# Altium PCB VCO.PcbDoc (part 1 of 3)
Units mil, origin at the board's own origin, x right, y up, seen from the top; angles counter-clockwise.
Board outline 4000 x 2000 mil, 4 copper layers (Top Layer, Signal Layer 1, Signal Layer 2, Bottom Layer), stack 60.6 mil thick; 123 components, 70 nets, 383 pads, 321 vias.
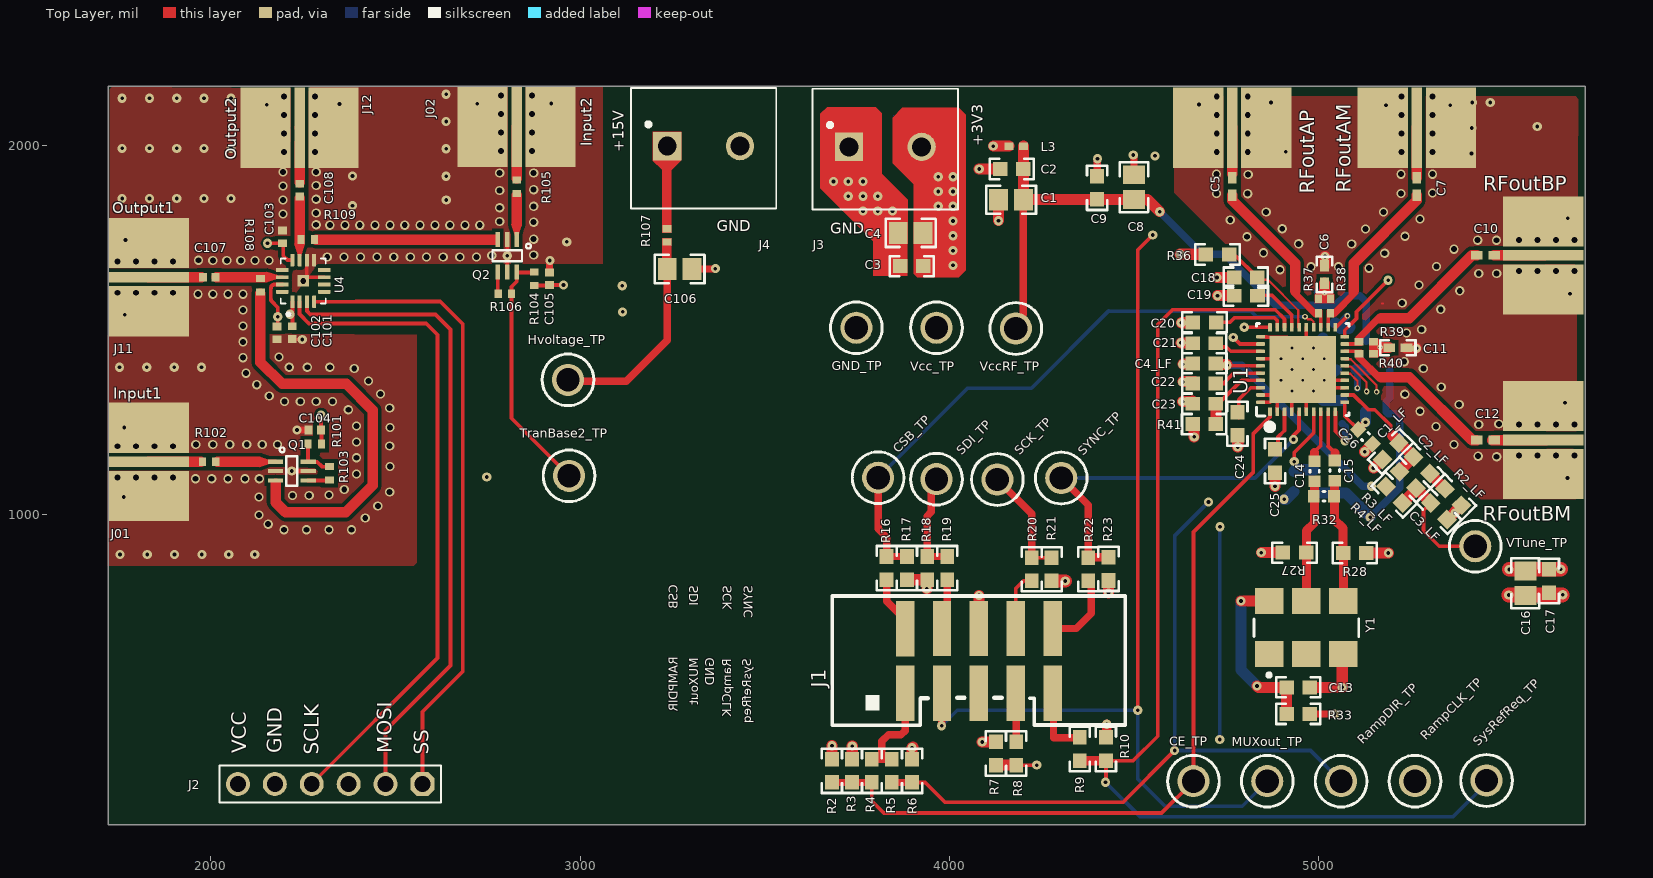
[diagram p0: Top Layer view]
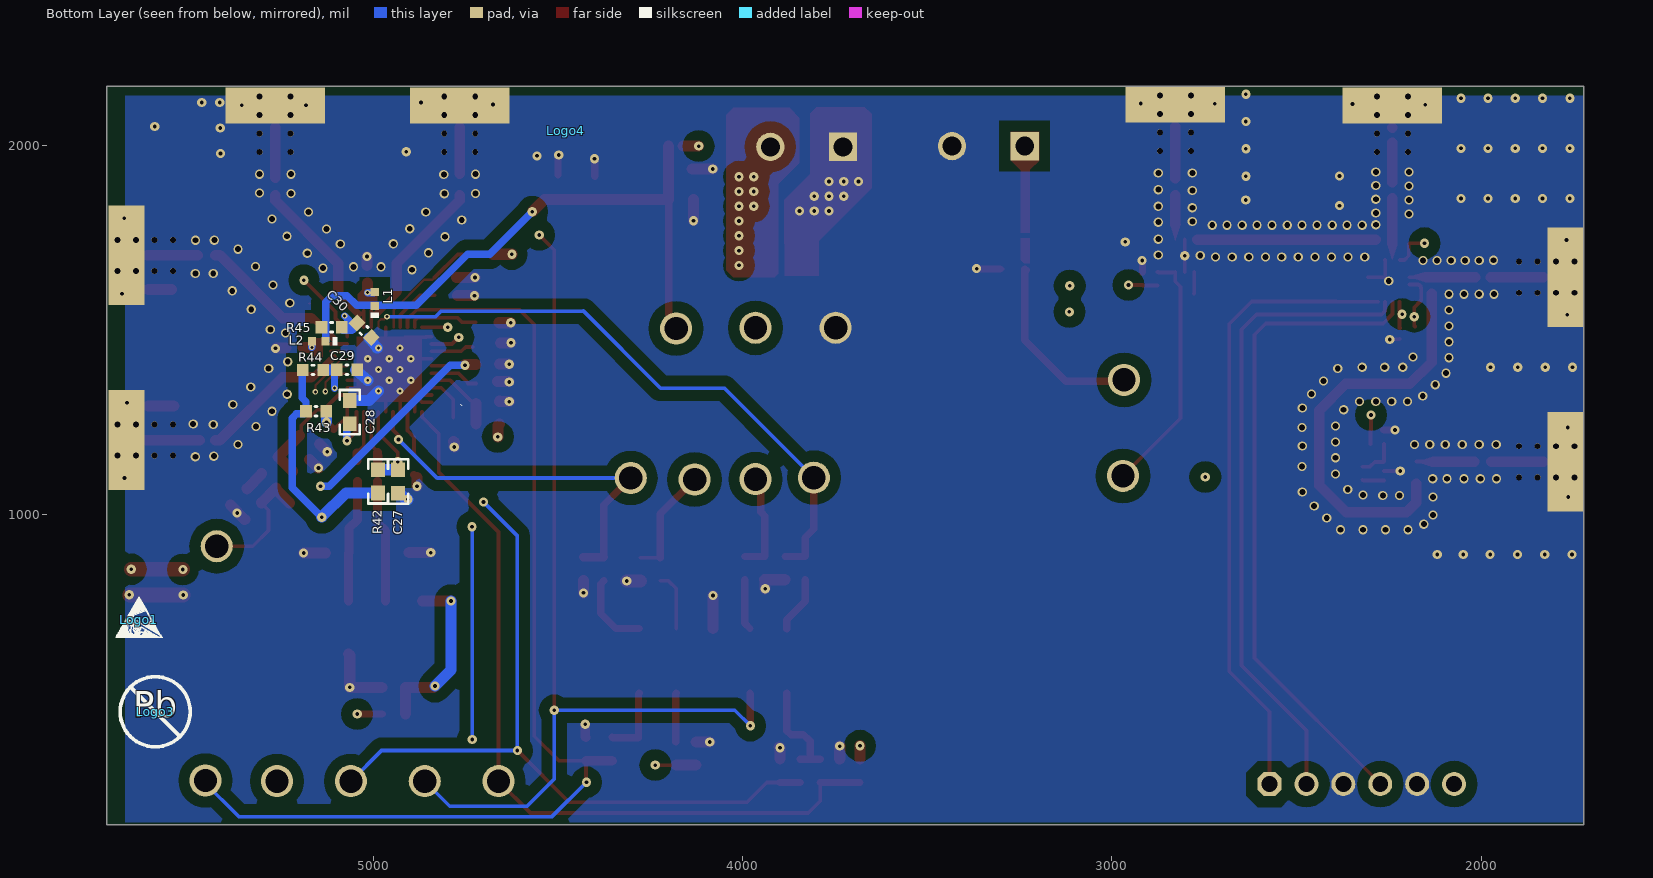
[diagram p1: Bottom Layer view, seen from below]
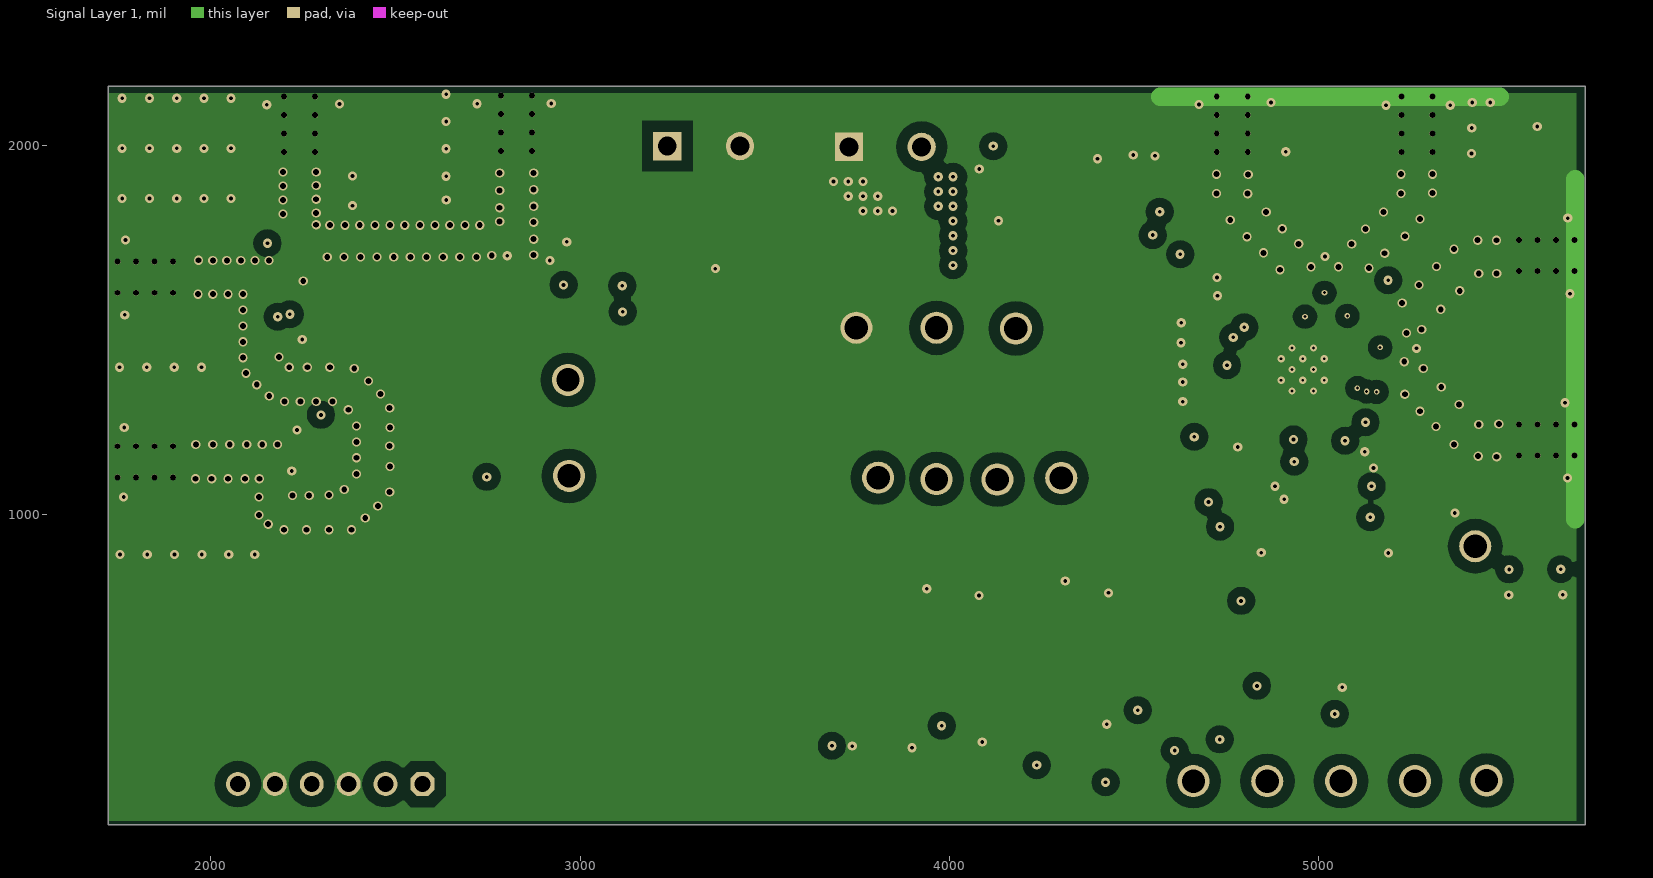
[diagram p2: Signal Layer 1]
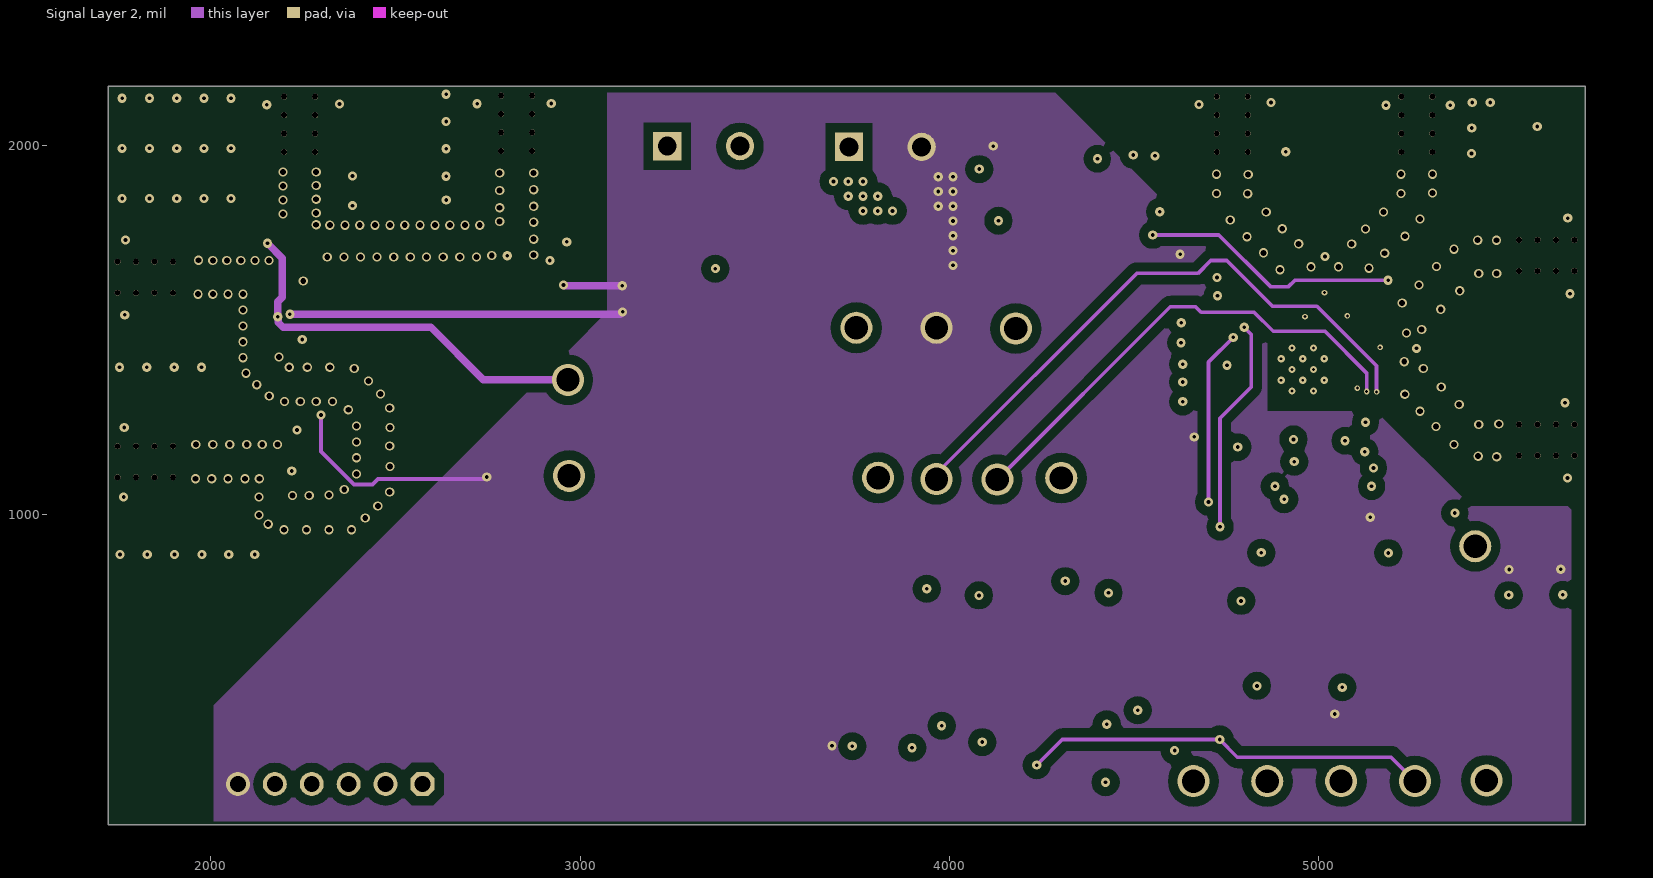
[diagram p3: Signal Layer 2]

## Layer stack, top to bottom
Top Solder: solder mask 0.4, Solder Resist, Dk 3.5
Top Layer: signal copper 1.4
Dielectric1: prepreg 16, Rogers4003C, Dk 3.38
Signal Layer 1: signal copper 1.4
Dielectric 3: core 27, Dk 4.1
Signal Layer 2: signal copper 1.4
Dielectric 2: prepreg 12, Dk 4.1
Bottom Layer: signal copper 1.4
Bottom Solder: solder mask 0.4, Solder Resist, Dk 3.5

## Board outline
1722,161 1722,2161 5722,2161 5722,161

## Design rules (kind name [scope] priority, off if disabled: settings)
AcuteAngle [All] p1: minimum=4.50000000000000E+0001 checktracksonly=FALSE
AssemblyTestPointUsage [All] p1: valid=2
Clearance Clearance_BoardEdge_MountingHoles [OnCopper and InComponentClass('Mounting Holes')] p1: gap=40 ignorepadtopadclearanceinfootprint=FALSE except(0: Arc-Hole Track-Hole SMDPad-Hole THPad-Hole Via-Hole Fill-Hole Poly-Hole Region-Hole Text-Hole)
Clearance Clearance_poly_top [OnLayer('Top Layer') vs InNet('GND')] p2: gap=6 ignorepadtopadclearanceinfootprint=FALSE except(0: Arc-Hole Track-Hole SMDPad-Hole THPad-Hole Via-Hole Fill-Hole Poly-Hole Region-Hole Text-Hole; 10: Arc-Poly Track-Poly SMDPad-Poly THPad-Poly Via-Poly Fill-Poly Poly-Poly Poly-Region Poly-Text)
Clearance Clearance_poly_gnd_25 [OnLayer('Signal Layer 1')] p3: gap=10 ignorepadtopadclearanceinfootprint=FALSE except(0: Arc-Hole Track-Hole SMDPad-Hole THPad-Hole Via-Hole Fill-Hole Poly-Hole Region-Hole Text-Hole; 25: Via-Poly; 30: Arc-Poly Track-Poly SMDPad-Poly THPad-Poly Fill-Poly Poly-Poly)
Clearance Clearance_poly_BOTTOM [OnLayer('Bottom Layer')] p4: gap=6 ignorepadtopadclearanceinfootprint=FALSE except(0: Arc-Hole Track-Hole SMDPad-Hole THPad-Hole Via-Hole Fill-Hole Poly-Hole Region-Hole Text-Hole; 30: Arc-Poly Track-Poly SMDPad-Poly THPad-Poly Via-Poly Fill-Poly Poly-Poly)
Clearance Clearance_poly_pwr_1 [OnLayer('Signal Layer 2')] p5: gap=6 ignorepadtopadclearanceinfootprint=FALSE except(0: Arc-Hole Track-Hole SMDPad-Hole THPad-Hole Via-Hole Fill-Hole Poly-Hole Region-Hole Text-Hole; 25: Arc-Poly Track-Poly SMDPad-Poly THPad-Poly Via-Poly Fill-Poly Poly-Poly Poly-Region Poly-Text)
Clearance [All] p6: gap=6 ignorepadtopadclearanceinfootprint=FALSE except(0: Arc-Hole Track-Hole SMDPad-Hole THPad-Hole Via-Hole Fill-Hole Poly-Hole Region-Hole Text-Hole)
ComponentClearance ComponentClearance_Logo [InComponentClass('Logo')] p1: gap=30 collisioncheckmode=3 verticalgap=10 showdistances=FALSE
ComponentClearance ComponentClearance_R14 [InComponent('R14') vs InComponent('R14p')] p2: gap=0 collisioncheckmode=3 verticalgap=0 showdistances=FALSE
ComponentClearance ComponentClearance_SYNC_BREAKAWAY [InComponent('H2') vs InComponent('SYNC*/SysRefReq*')] p3: gap=0 collisioncheckmode=3 verticalgap=0 showdistances=FALSE
ComponentClearance ComponentClearance_ScrewToNut [(HasFootprint('NY PMS 440 0025 PH')) vs (HasFootprint('Keystone_1902C'))] p4: gap=5 collisioncheckmode=3 verticalgap=10 showdistances=FALSE
ComponentClearance ComponentClearance_MountingHoles [InComponentClass('Mounting Holes')] p5: gap=250 collisioncheckmode=3 verticalgap=100000 showdistances=FALSE
ComponentClearance ComponentClearance_SmallPassives [HasFootprint('0201*') or HasFootprint('0402*') or HasFootprint('0508') or HasFootprint('0603*') or HasFootprint('0612') or HasFootprint('0805*') or HasFootprint('0815*') or HasFootprint('0830*') or HasFootprint('1206*') or HasFootprint('1210*') or HasFootprint('1808*') or HasFootprint('1812*') or HasFootprint('1825*') or HasFootprint('2010*') or HasFootprint('2220*') or HasFootprint('2225*') or HasFootprint('2512*') or HasFootprint('2728*') or HasFootprint('3518*') vs HasFootprint('0201*') or HasFootprint('0402*') or HasFootprint('0508') or HasFootprint('0603*') or HasFootprint('0612') or HasFootprint('0805*') or HasFootprint('0815*') or HasFootprint('0830*') or HasFootprint('1206*') or HasFootprint('1210*') or HasFootprint('1808*') or HasFootprint('1812*') or HasFootprint('1825*') or HasFootprint('2010*') or HasFootprint('2220*') or HasFootprint('2225*') or HasFootprint('2512*') or HasFootprint('2728*') or HasFootprint('3518*')] p6: gap=5 collisioncheckmode=3 verticalgap=10 showdistances=FALSE
ComponentClearance ComponentClearance_THtoSMT [IsThruComponent vs IsSMTComponent] p7: gap=13 collisioncheckmode=3 verticalgap=30 showdistances=FALSE
ComponentClearance ComponentClearance_THtoTH [IsThruComponent vs IsThruComponent] p8: gap=13 collisioncheckmode=3 verticalgap=30 showdistances=FALSE
ComponentClearance [All] p9: gap=8 collisioncheckmode=3 verticalgap=10 showdistances=FALSE
DiffPairsRouting [All] p1: maxlimit=100 minlimit=10 mostfreqgap=10 toplayer_minwidth=15 toplayer_maxwidth=15 toplayer_prefwidth=15 midlayer1_minwidth=15 midlayer1_maxwidth=15 midlayer1_prefwidth=15 midlayer2_minwidth=15 midlayer2_maxwidth=15 midlayer2_prefwidth=15 bottomlayer_minwidth=15 bottomlayer_maxwidth=15 bottomlayer_prefwidth=15 maxuncoupledlength=1000
FabricationTestPointUsage TestPointUsage [All] p1: valid=2 allowmultiple=FALSE
FabricationTestpoint Testpoint [All] p1: side=3 testpointundercomponent=TRUE minsize=40 maxsize=100 preferedsize=60 minholesize=0 maxholesize=40 preferedholesize=32 testpointgrid=1 allowsidetop=TRUE allowsidebottom=TRUE usegrid=TRUE gridtolerance=0.01
FanoutControl Fanout_LCC [IsLCC] p1: bgadir=Out bgaviamode=Centered fanoutstyle=Auto fanoutdirection=Alternating viagrid=1 // Fanout_LCC (Default Rule)
FanoutControl Fanout_BGA [IsBGA] p2: bgadir=Out bgaviamode=Centered fanoutstyle=Auto fanoutdirection=Alternating viagrid=1 // Fanout_BGA (Default Rule)
FanoutControl Fanout_Default [All] p4: bgadir=Out bgaviamode=Centered fanoutstyle=Auto fanoutdirection=Alternating viagrid=1 // Fanout_Default (Default Rule)
FanoutControl Fanout_Small [(CompPinCount < 5)] p5: bgadir=Out bgaviamode=Centered fanoutstyle=Auto fanoutdirection=OutThenIn viagrid=1 // Fanout_Small (Default Rule)
HoleSize [All] p1: absolutevalues=TRUE maxlimit=580 minlimit=7.8 maxpercent=80.000 minpercent=20.000
MinimumAnnularRing MinimumAnnularRing_ThermalPadVias [IsVia and InAnyComponent] p1: minimumring=5.91
MinimumAnnularRing [All] p2: minimumring=3.5
MinimumSolderMaskSliver MinimumSolderMaskSliver_Logo [InComponentClass('Logo') vs InComponentClass('Logo')] p1: minsoldermaskwidth=0.7
MinimumSolderMaskSliver [All] p2: minsoldermaskwidth=0.2
PlaneClearance PlaneClearance_1 [withinroom('RF2')        or withinroom('RFvia_1')] p2: clearance=25
PlaneConnect [All] p1: planeconnectstyle=Direct reliefexpansion=10 reliefentries=4 reliefconductorwidth=10 reliefairgap=10
PolygonConnect PolygonConnect-pad [ispad] p1: connectstyle=Direct reliefconductorwidth=15 reliefentries=4 polygonreliefangle="90 Angle" airgapwidth=10
PolygonConnect PolygonConnect-via [isvia] p2: connectstyle=Direct reliefconductorwidth=10 reliefentries=4 polygonreliefangle="90 Angle" airgapwidth=10
RoomDefinition VCO [InComponentClass('VCO')] p1: confinementstyle=ConfineIn formatcopy=TRUE lockcomponents=FALSE outline -942,-2294 6707,-2294 6707,2605 -942,2605
RoomDefinition PVC [InComponentClass('PVC')] p2: confinementstyle=ConfineIn formatcopy=TRUE lockcomponents=FALSE outline 1061,2607 6738,2607 6738,-420 1061,-420
RoutingVias [All] p1: holewidth=13 width=25 viastyle="Through Hole" minholewidth=2 minwidth=5 maxholewidth=18 maxwidth=25
RoutingVias ThermalPadVias [IsVia and InAnyComponent] p2: holewidth=7.87 width=19.68 viastyle="Through Hole" minholewidth=2 minwidth=5 maxholewidth=12.99 maxwidth=23.62
SMDToCorner [All] p1: distance=30000
SilkToSilkClearance [All] p1: silktosilkclearance=0
SilkToSolderMaskClearance SilkscreenOverComponentPads [IsPad] p1: minsilkscreentomaskgap=0.9 clearancetoexposedcopper=TRUE
SolderMaskExpansion [All] p1: expansion=1.97 istentingtop=FALSE
Width 50ohm [InNetClass('50OHM')] p1: maxlimit=50 minlimit=8 preferedwidth=20
Width [All] p2: maxlimit=200 minlimit=5 preferedwidth=5 checkconnectedcopper=TRUE
16 further rules are at their usual default settings.

## Classes and differential pairs
component class VCO: C1 C1_LF C2 C2_LF C3 C3_LF C4 C4_LF C5 C6 C7 C8 C9 C10 C11 C12 C13 C14 C15 C16 C17 C18 C19 C20 C21 C22 C23 C24 C25 C26 C27 C28 C29 C30 CSB_TP GND_TP J1 J3 L1 L2 L3 Logo1 Logo3 Logo4 MUXout_TP R2 R2_LF R3 R3_LF R4 R4_LF R5 R6 R7 R8 R9 R10 R16 R17 R18 R19 R20 R21 R22 R23 R27 R28 R32 R33 R36 R37 R38 R39 R40 R41 R42 R43 R44 R45 RampCLK_TP RampDIR_TP RFoutAM RFoutAP RFoutBM RFoutBP SCK_TP SDI_TP SYNC_TP SysRefReq_TP U1 Vcc_TP VccRF_TP Vtune_TP Y1
component class PVC: C101 C102 C103 C104 C105 C106 C107 C108 Hvoltage_TP J01 J2 J02 J4 J11 J12 Q1 Q2 R101 R102 R103 R104 R105 R106 R107 R108 R109 TranBase2_TP U4
component class Header: J1

## Components (designator, comment, footprint, x,y, rotation, side; value= is the part's Value field where it differs from the comment)
C1 "0603YC104JAT2A" 0603 4169,1937 r0 top value=0.1uF
C1_LF "C0603C391J5GACTU" 0603 5195,1172.8 r225 top value=390pF
C2 "C0805C106K8PACTU" 0805 4167,1854 r0 top value=10uF
C2_LF "GRM188R71H683KA93D" 0603 5279.6,1134.5 r315 top value=0.068uF
C3 "0603YC104JAT2A" 0603 3898,1674 r0 top value=0.1uF
C3_LF "GRM1885C2A301JA01D" 0603 5325.86,1010.1 r315 top value=300pF
C4 "C0805C106K8PACTU" 0805 3895,1764 r0 top value=10uF
C4_LF "GRM1885C1H182JA01D" 0603 4690.5,1410.6 r0 top value=1800pF
C5 "520L103KT16T" 0402_065 4766.06,1889.3 r270 top value=0.01uF
C6 "520L103KT16T" 0402_065 5016.06,1651.5 r270 top value=0.01uF
C7 "520L103KT16T" 0402_065 5266.06,1889.3 r270 top value=0.01uF
C8 "C0805C106K8PACTU" 0805 4500,1888 r270 top value=10uF
C9 "0603YC104JAT2A" 0603 4400,1886 r270 top value=0.1uF
C10 "520L103KT16T" 0402_065 5452.3,1703.11 r180 top value=0.01uF
C11 "520L103KT16T" 0402_065 5214.5,1453.06 r180 top value=0.01uF
C12 "520L103KT16T" 0402_065 5452.3,1203 r180 top value=0.01uF
C13 "C1608X7R1C105K080AC" 0603 4945,533 r0 top value=1uF
C14 "0603YC104JAT2A" 0603L 4989,1118.4 r90 top value=0.1uF
C15 "0603YC104JAT2A" 0603L 5044.18,1120.1 r90 top value=0.1uF
C16 "C0805C106K8PACTU" 0805 5560,815 r90 top value=10uF
C17 "0603YC104JAT2A" 0603 5624,821 r90 top value=0.1uF
C18 "C1608X7R1C105K080AC" 0603 4802.8,1643 r0 top value=1uF
C19 "C1608X5R1A106M080AC" 0603 4803,1594 r0 top value=10uF
C20 "C1608X5R1A106M080AC" 0603 4691,1521.7 r180 top value=10uF
C21 "C1608X5R1A106M080AC" 0603 4690.3,1465.3 r0 top value=10uF
C22 "C1608X5R1A106M080AC" 0603 4690.3,1356.2 r180 top value=10uF
C23 "C1608X7R1C105K080AC" 0603 4690.3,1301.3 r0 top value=1uF
C24 "C1608X7R1C105K080AC" 0603 4780.3,1246.9 r90 top value=1uF
C25 "C1608X5R1A106M080AC" 0603 4882.03,1146.4 r270 top value=10uF
C26 "C1608X7R1C105K080AC" 0603L 5126.7,1212 r135 top value=1uF
C27 "C1608X7R1C105K080AC" 0603 4933.3,1090.9 r90 bottom value=1uF
C28 "C1608X7R1C105K080AC" 0603 5064.15,1278.51 r270 bottom value=1uF
C29 "C1608X7R1C105K080AC" 0603L 5071.7,1393 r180 bottom value=1uF
C30 "0603YC104JAT2A" 0603L 5025.2,1500.2 r45 bottom value=0.1uF
C101 "C0402" C0402 2220,1494 r90 top value=0.1uF
C102 "C0402" C0402 2179,1493 r270 top value=0.1uF
C103 "C0402" C0402 2194,1753 r90 top value=0.1uF
C104 "C0402" C0402 2281,1230 r180 top value=0.1uF
C105 "C0402" C0402 2917,1639.99 r90 top value=0.1uF
C106 "C0805" 0805 3269.2,1666.2 r0 top value=10uF
C107 "520L103KT16T" C0402 1995,1644 r180 top value=0.01uF
C108 "520L103KT16T" C0402 2240.15,1880 r90 top value=0.01uF
CE_TP "5007" KEYSTONE5007 4661,279 r0 top value=White
CSB_TP "5007" KEYSTONE5007 3807,1101 r0 top value=White
GND_TP "5007" KEYSTONE5007 3748,1507 r270 top value=White
Hvoltage_TP "5007" KEYSTONE5007 2967,1366 r90 top value=White
J01 "142-0771-831" Johnson_142-0771-831 1722,1144 r90 top
J1 "52601-S10-8LF" FCI_52601-S10-8LF 4080,605 r90 top
J2 "SPI" 61300611121 2323,271 r180 top
J02 "142-0771-831" Johnson_142-0771-831 2828,2161 r0 top
J3 "3V3" PHOENIX_1935161 3826.43,1997 r0 top
J4 "15V" PHOENIX_1935161 3334.43,1999 r0 top
J11 "142-0771-831" Johnson_142-0771-831 1722,1644 r90 top
J12 "142-0771-831" Johnson_142-0771-831 2240.15,2158 r0 top
L1 "LQG15HS18NJ02D" IND_LQG15H 4996.42,1585.24 r90 bottom value=18nH
L2 "LQG15HS18NJ02D" IND_LQG15H 5148.2,1470.8 r0 bottom value=18nH
L3 "LQG15HS18NJ02D" 0402L 4181,1999 r0 top value=18nH
Logo1 "ESD Susceptible" ESD_Overlay_Small 5636,716 r180 bottom
Logo3 "Pb-Free Symbol" Pb-Free_Overlay_Medium 5591,467 r180 bottom
Logo4 "FCC disclaimer" FCC_disclaimer 4479,2040 r180 bottom
MUXout_TP "5007" KEYSTONE5007 4861,279 r0 top value=White
Q1 "BFU520YX" SOT363-EXT 2219,1119 r270 top
Q2 "BFU520YX" SOT363-EXT 2802.5,1702.09 r180 top
R2 "CRCW0603100KJNEA" 0603 3682,307 r270 top value=100k
R2_LF "CRCW060368R0JNEA" 0603 5365,1048.7 r315 top value=68
R3 "CRCW060312K0JNEA" 0603 3736,307 r270 top value=12k
R3_LF "CRCW06030000Z0EA" 0603 5241.8,1094.9 r315 top value=0
R4 "CRCW060312K0JNEA" 0603 3790,307 r270 top value=12k
R4_LF "CRCW060318R0JNEA" 0603 5205,1054.7 r315 top value=18
R5 "CRCW060312K0JNEA" 0603 3844,307 r90 top value=12k
R6 "CRCW060312K0JNEA" 0603 3899,307 r270 top value=12k
R7 "CRCW060312K0JNEA" 0603 4126,354 r270 top value=12k
R8 "CRCW060312K0JNEA" 0603 4181,354 r270 top value=12k
R9 "CRCW060312K0JNEA" 0603 4353,366 r270 top value=12k
R10 "CRCW060312K0JNEA" 0603 4424,366 r270 top value=12k
R16 "CRCW060312K0JNEA" 0603 3830,856 r90 top value=12k
R17 "CRCW060312K0JNEA" 0603 3885,856 r90 top value=12k
R18 "CRCW060312K0JNEA" 0603 3940,856 r90 top value=12k
R19 "CRCW060312K0JNEA" 0603 3994,856 r270 top value=12k
R20 "CRCW060312K0JNEA" 0603 4223,853 r90 top value=12k
R21 "CRCW060312K0JNEA" 0603 4277,853 r90 top value=12k
R22 "CRCW060312K0JNEA" 0603 4376,853 r90 top value=12k
R23 "CRCW060312K0JNEA" 0603 4431,854 r90 top value=12k
R27 "CRCW0603140RFKEA" 0603 4935,898 r0 top value=140
R28 "CRCW0603140RFKEA" 0603 5098,897 r180 top value=140
R32 "CRCW0603100RFKEA" 0603L 5014.31,1050.49 r180 top value=100
R33 "CRCW060310R0JNEA" 0603 4945,461 r0 top value=10
R36 "CRCW06030000Z0EA" 0603 4726.2,1705.5 r180 top value=0
R37 "FC0402E50R0BST1" 0402L 4999.9,1566.1 r90 top value=50
R38 "FC0402E50R0BST1" 0402L 5032.21,1566.1 r90 top value=50
R39 "FC0402E50R0BST1" 0402L 5129.1,1469.21 r0 top value=50
R40 "FC0402E50R0BST1" 0402L 5129.1,1436.9 r180 top value=50
R41 "CRCW06030000Z0EA" 0603 4690.1,1246.1 r180 top value=0
R42 "CRCW06030000Z0EA" 0603 4987.24,1090.99 r90 bottom value=0
R43 "CRCW06030000Z0EA" 0603L 5155.05,1280.52 r180 bottom value=0
R44 "CRCW06030000Z0EA" 0603L 5163.5,1392.8 r180 bottom value=0
R45 "CRCW06030000Z0EA" 0603L 5113.01,1508.91 r180 bottom value=0
R101 "R0402" R0402 2281,1192 r0 top value=10K
R102 "R0402" R0402 1995,1144 r180 top value=1K
R103 "R0402" R0402 2321,1113 r270 top value=1K
R104 "R0402" R0402 2876,1640 r270 top value=10K
R105 "R0402" R0402 2828,1889 r90 top value=1K
R106 "R0402" R0402 2796,1599 r180 top value=1K
R107 "R0402" R0402 3235.2,1757.2 r90 top value=4k7
R108 "R0402" R0402 2134,1622 r270 top value=0R
R109 "R0402" R0402 2262,1746 r0 top value=0R
RampCLK_TP "5007" KEYSTONE5007 5261,279 r0 top value=White
RampDIR_TP "5007" KEYSTONE5007 5061,279 r0 top value=White
RFoutAM "142-0771-831" Johnson_142-0771-831 5266.06,2158 r0 top
RFoutAP "142-0771-831" Johnson_142-0771-831 4766.06,2158 r0 top
RFoutBM "142-0771-831" Johnson_142-0771-831 5718,1203.06 r270 top
RFoutBP "142-0771-831" Johnson_142-0771-831 5718,1703.06 r270 top
SCK_TP "5007" KEYSTONE5007 4130,1096 r0 top value=White
SDI_TP "5007" KEYSTONE5007 3965,1097 r0 top value=White
SYNC_TP "5007" KEYSTONE5007 4303,1100 r180 top value=White
SysRefReq_TP "5007" KEYSTONE5007 5455,281 r0 top value=White
TranBase2_TP "5007" KEYSTONE5007 2970,1106 r90 top value=White
U1 "LMX2594RHAR" RHA0040A 4957,1394 r90 top
U4 "MAX5487ETET" "QFN50P300X300X80-17N - duplicate" 2250,1634 r90 top
Vcc_TP "5007" KEYSTONE5007 3965,1507 r90 top value=White
VccRF_TP "5007" KEYSTONE5007 4180,1505 r90 top value=White
VTune_TP "5007" KEYSTONE5007 5424.3,915.3 r0 top value=White (schematic designator Vtune_TP)
Y1 "VC-708-EDE-FNXN-100M000000" Vectron_VC-708 4967,695 r90 top

## Footprints (in the part's own frame and the unit in brackets; to place one, negate y for a bottom-side part, rotate by r counter-clockwise, add the part's x,y. Pads: shape width x height; smd on the part's side, far side on the other; paste and mask are expansions set on the pad)
0402_065 [mm] "0402"
  rect 0.8x0.6 smd: 1(-0.6,0) 2(0.6,0)
  body extent -0.55,-0.3 0.55,0.3, height 0.65
0402L [mm]
  rect 0.6x0.5 smd: 1(-0.5,0) 2(0.5,0)
  body extent -0.55,-0.3 0.55,0.3, height 0.6
0603 [mm] "0603 from SM-752 data"
  rect 1x0.95 smd: 1(-0.8,0) 2(0.8,0)
  silkscreen extent -1.52,-0.69 1.52,0.69, body extent -0.87,-0.47 0.87,0.47, height 1
0603L [mm] "0603 from SM-752 data"
  rect 0.8x0.85 smd: 1(-0.7,0) 2(0.7,0)
  silkscreen extent -0.07,-0.33 0.07,0.33, body extent -0.87,-0.47 0.87,0.47, height 1
0805 [mm] "0805 from SM-752 data"
  rect 1.3x1.5 smd: 1(-0.85,0) 2(0.85,0)
  silkscreen extent -1.72,-0.97 1.72,0.97, body extent -1.1,-0.72 1.1,0.72, height 1.45
61300611121 [mm]
  oct 1.65x1.65 hole 1.1: 1(-6.35,0)
  round 1.65 hole 1.1: 2(-3.81,0) 3(-1.27,0) 4(1.27,0) 5(3.81,0) 6(6.35,0)
  silkscreen extent -7.62,-1.27 7.62,1.27, body extent -7.62,-1.27 7.62,1.27, height 8.54
C0402 [mm]
  rect 0.54x0.6 smd: 1(-0.432,0) 2(0.432,0)
  body extent -0.5,-0.27 0.5,0.28, height 0.48
ESD_Overlay_Small [mil]
  silkscreen extent -62,-48 64,61
FCC_disclaimer [mil]
FCI_52601-S10-8LF [mil] "FCI Electronics"
  rect 150x50 smd: 1(-87.5,200) 2(86.5,200) 3(-87.5,100) 4(87.5,100) 5(-87.5,0) 6(87.5,0) 7(-87.5,-100) 8(87.5,-100) 9(-87.5,-200) 10(87.5,-200)
  silkscreen extent -175,-396 176,397, body extent -172,-395 173,395, height 496
IND_LQG15H [mm] "MuRata"
  rect 0.55x0.6 smd: 1(-0.475,0) 2(0.475,0)
  silkscreen extent -1.3,-0.3 -0.95,0.3, body extent -0.52,-0.27 0.52,0.27, height 0.55
Johnson_142-0771-831 [mil]
  rect 28.5x218 smd: 1(0,-109)
  rect 135.75x218 smd: 2(-92.12,-109) 3(92.13,-109)
  rect 270x97.5 smd far side: 4(0,-48.75)
  round 16 hole 16: ""(-42,-25) ""(-42,-125) ""(-42,-75) ""(-42,-175) ""(42,-25) ""(42,-125) ""(42,-75) ""(42,-175)
  body extent -124,-179 123,375, height 131
KEYSTONE5007 [mil]
  round 87 hole 63: 1(0,0)
  silkscreen extent -70,-70 70,70, body extent -63,-63 62,63, height 225
Pb-Free_Overlay_Medium [mil]
  silkscreen extent -95,-95 95,95
PHOENIX_1935161 [mm]
  rect 1.95x1.95 hole 1.3: 1(-2.5,0)
  round 1.95 hole 1.3: 2(2.5,0)
  silkscreen extent -5,-4.3 5,4, body extent -5.36,-4.04 5.04,4.96, height 11.54
"QFN50P300X300X80-17N - duplicate" [mm]
  rrect25% 0.86x0.27 smd: 1(-1.435,0.75) 2(-1.435,0.25) 3(-1.435,-0.25) 4(-1.435,-0.75) 9(1.435,-0.75) 10(1.435,-0.25) 11(1.435,0.25) 12(1.435,0.75)
  rrect25% 0.27x0.86 smd: 5(-0.75,-1.435) 6(-0.25,-1.435) 7(0.25,-1.435) 8(0.75,-1.435) 13(0.75,1.435) 14(0.25,1.435) 15(-0.25,1.435) 16(-0.75,1.435)
  rect 0.8x0.8 smd paste-1: 17(0,0)
  silkscreen extent -2.39,-1.55 1.55,1.55, body extent -1.55,-1.52 1.49,1.52, height 0.9
R0402 [mm]
  rect 0.49x0.6 smd: 1(-0.457,0) 2(0.457,0)
  body extent -0.5,-0.25 0.5,0.25, height 0.35
RHA0040A [mm] "QFN, 40-Leads, Body 6x6mm, Pitch 0.5mm, Thermal Pad 4.6x4.6mm, TI Recommended"
  rrect40% 0.6x0.25 smd: 1(-2.9,2.25) 2(-2.9,1.75) 3(-2.9,1.25) 4(-2.9,0.75) 5(-2.9,0.25) 6(-2.9,-0.25) 7(-2.9,-0.75) 8(-2.9,-1.25) 9(-2.9,-1.75) 10(-2.9,-2.25) 21(2.9,-2.25) 22(2.9,-1.75) 23(2.9,-1.25) 24(2.9,-0.75) 25(2.9,-0.25) 26(2.9,0.25) 27(2.9,0.75) 28(2.9,1.25) 29(2.9,1.75) 30(2.9,2.25)
  rrect40% 0.25x0.6 smd: 11(-2.25,-2.9) 12(-1.75,-2.9) 13(-1.25,-2.9) 14(-0.75,-2.9) 15(-0.25,-2.9) 16(0.25,-2.9) 17(0.75,-2.9) 18(1.25,-2.9) 19(1.75,-2.9) 20(2.25,-2.9) 31(2.25,2.9) 32(1.75,2.9) 33(1.25,2.9) 34(0.75,2.9) 35(0.25,2.9) 36(-0.25,2.9) 37(-0.75,2.9) 38(-1.25,2.9) 39(-1.75,2.9) 40(-2.25,2.9)
  rrect2% 4.6x4.6 smd paste-2.3: 41(0,0)
  silkscreen extent -3.2,-3.18 3.18,3.18, body extent -3,-3 3,3, height 1
SOT363-EXT [mm]
  rect 0.3x1.06 smd: 1(-0.65,-1.12) 2(0,-1.12) 3(0.65,-1.12) 4(0.65,1.12) 5(0,1.12) 6(-0.65,1.12)
  silkscreen extent -1.62,-0.83 1.02,0.38, body extent -1,-1.05 1,1.05, height 1.08
Vectron_VC-708 [mm] "SMD, 6-Leads, Body 5x7mm, Pitch 2.54mm"
  rect 1.78x1.96 smd: 1(-1.83,2.54) 2(-1.83,0) 3(-1.83,-2.54) 4(1.83,-2.54) 5(1.83,0) 6(1.83,2.54)
  silkscreen extent -3.39,-3.6 0.6,3.6, body extent -2.58,-3.57 2.58,3.57, height 1.8

## Part data
C1 C3 C9 C14 C15 C17 C30: "CAP, CERM, 0.1uF, 16V, +/-5%, X7R, 0603", Alternate Manufacturer=-, Cap_Case=0603, Dielectric=X7R, DigiKeyPartNumber=478-3726-1-ND, Manufacturer=AVX, Tolerance_%=5, Value1="0.039 ohm", Value2=16V, ValueDisplayed=0.1µF, Alternate PartNumber=-, Cap_F=0.0000001, ComponentLink1Description="Datasheet link", ComponentLink1URL=http://www.avx.com/docs/masterpubs/smccp.pdf, CompType=Capacitor, ESR_Ohm=0.039, LatestRevisionDate=2011-06-13, LatestRevisionNote="Added Alternate PartNumber and Alternate Manufacturer parameters.", MountType=SMT, PackageReference=0603, PartNumber=0603YC104JAT2A, Polarized=N, Published=2008-06-19, Publisher="National Semiconductor", RoHS=Y, SymbolVersion=2008-07-09, TaMax_C=125, TaMin_C=-55, Technology=Ceramic, U/M=EA, VDC_V=16
C1_LF: "CAP, CERM, 390 pF, 50 V, +/- 5%, C0G/NP0, 0603", Cap_Case=0603, Manufacturer=Kemet, Supplier Part Number 1=399-1069-1-ND, TempCo=C0G/NP0, Tolerance_%=5, Value1=Unknown, Value2=50V, ValueDisplayed=390pF, AEC Category=Q200, AEC Qualified=?, Cap_F=0.00000000039, ComponentLink1Description="Datasheet link", ComponentLink1URL=http://www.kemet.com/kemet/web/homepage/kechome.nsf/vapubfiles/F3102_Y5V.pdf/$file/F3102_Y5V.pdf, CompType=Capacitor, LatestRevisionDate=2016-11-28, MountType=SMT, PackageReference=0603, PartNumber=C0603C391J5GACTU, Polarized=N, Published=2008-06-19, Publisher="Texas Instruments", RoHS=Y, SizeArea_mm2=1.28, SizeAreaWB_mm2=4.68, SizeX_mm=1.6, SizeY_mm=0.8, SizeZ_mm=1, Supplier 1=Digi-Key, Supplier 2=Mouser, Supplier 3=Farnell, Supplier Part Number 2=80-C0603C391J5G, Supplier Part Number 3=1414638, SymbolVersion=2008-07-09, TaMax_C=125, TaMin_C=-55, Technology=Ceramic, U/M=EA, VDC_V=50
C2 C4 C8 C16: "CAP, CERM, 10uF, 10V, +/-10%, X5R, 0805", Alternate Manufacturer=-, Cap_Case=0805, Dielectric=X5R, DigiKeyPartNumber=399-4925-1-ND, Manufacturer=Kemet, Supplier Part Number 1=70K9138, Tolerance_%=10, Value1="0.003 ohm", Value2=10V, ValueDisplayed=10µF, Alternate PartNumber=-, Cap_F=0.00001, ComponentLink1Description="Datasheet link", ComponentLink1URL=http://www.kemet.com/kemet/web/homepage/kechome.nsf/file/Partial%20Copy%20-%20Ceramic%20Surface%20Mount%20Capacitors/$file/F3102_CE.pdf, CompType=Capacitor, ESR_Ohm=0.003, IRMS_A=11.43, LatestRevisionDate=2011-03-11, LatestRevisionNote="Added Alternate PartNumber and Alternate Manufacturer parameters.", MountType=SMT, PackageReference=0805, PartNumber=C0805C106K8PACTU, Polarized=N, Published=2008-06-19, Publisher="National Semiconductor", RoHS=Y, Supplier 1=Newark, SymbolVersion=2008-07-09, TaMax_C=85, TaMin_C=-55, Technology=Ceramic, U/M=EA, VDC_V=10
C2_LF: "CAP, CERM, 0.068 µF, 50 V, +/- 10%, X7R, 0603", Cap_Case=0603, Manufacturer=MuRata, Supplier Part Number 1=490-3288-1-ND, TempCo=X7R, Tolerance_%=10, Value1=Unknown, Value2=50V, ValueDisplayed=0.068µF, AEC Category=Q200, AEC Qualified=?, Cap_F=0.000000068, ComponentLink1Description="Datasheet link", ComponentLink1URL=http://search.murata.co.jp/Ceramy/PnsearchViewAction.do?HnOFG=ON&HnNFG=ON&SEL_CNT=50&sLang=en&sKey=GRM188R71H683KA93D&x=9&y=9&search=startwith, CompType=Capacitor, LatestRevisionDate=2016-11-28, MountType=SMT, PackageReference=0603, PartNumber=GRM188R71H683KA93D, Polarized=N, Published=2008-06-19, Publisher="Texas Instruments", RoHS=Y, SizeArea_mm2=1.28, SizeAreaWB_mm2=4.68, SizeX_mm=1.6, SizeY_mm=0.8, SizeZ_mm=1, Supplier 1=Digi-Key, Supplier 2=Mouser, Supplier 3=Farnell, Supplier Part Number 2=81-GRM188R71H683KA93, Supplier Part Number 3=1403793, SymbolVersion=2008-07-09, TaMax_C=125, TaMin_C=-55, Technology=Ceramic, U/M=EA, VDC_V=50
C3_LF: "CAP, CERM, 300pF, 100V, +/-5%, C0G/NP0, 0603", Cap_Case=0603, Manufacturer=MuRata, Supplier Part Number 1=490-1362-1-ND, TempCo=C0G/NP0, Tolerance_%=5, Value1=Unknown, Value2=100V, ValueDisplayed=300pF, Cap_F=0.0000000003, ComponentLink1Description="Datasheet link", ComponentLink1URL=http://search.murata.co.jp/Ceramy/PnsearchViewAction.do?HnOFG=ON&HnNFG=ON&SEL_CNT=50&sLang=en&sKey=GRM1885C2A301JA01D&x=9&y=9&search=startwith, CompType=Capacitor, LatestRevisionDate=2014-03-28, MountType=SMT, PackageReference=0603, PartNumber=GRM1885C2A301JA01D, Polarized=N, Published=2008-06-19, Publisher="Texas Instruments", RoHS=Y, Supplier 1=Digi-Key, Supplier 2=Mouser, Supplier Part Number 2=81-GRM1885C2A301JA1D, SymbolVersion=2008-07-09, TaMax_C=125, TaMin_C=-55, Technology=Ceramic, U/M=EA, VDC_V=100
C4_LF: "CAP, CERM, 1800 pF, 50 V, +/- 5%, C0G/NP0, 0603", Cap_Case=0603, Manufacturer=MuRata, Supplier Part Number 1=490-1457-1-ND, TempCo=C0G/NP0, Tolerance_%=5, Value1=Unknown, Value2=50V, ValueDisplayed=1800pF, AEC Category=Q200, AEC Qualified=?, Cap_F=0.0000000018, ComponentLink1Description="Datasheet link", ComponentLink1URL=http://search.murata.co.jp/Ceramy/PnsearchViewAction.do?HnOFG=ON&HnNFG=ON&SEL_CNT=50&sLang=en&sKey=GRM1885C1H182JA01D&x=9&y=9&search=startwith, CompType=Capacitor, LatestRevisionDate=2016-11-28, MountType=SMT, PackageReference=0603, PartNumber=GRM1885C1H182JA01D, Polarized=N, Published=2008-06-19, Publisher="Texas Instruments", RoHS=Y, SizeArea_mm2=1.28, SizeAreaWB_mm2=4.68, SizeX_mm=1.6, SizeY_mm=0.8, SizeZ_mm=1, Supplier 1=Digi-Key, Supplier 2=Mouser, Supplier Part Number 2=81-GRM1885C1H182JA01, SymbolVersion=2008-07-09, TaMax_C=125, TaMin_C=-55, Technology=Ceramic, U/M=EA, VDC_V=50
C5 C6 C7 C10 C11 C12 C107 C108: "CAP, CERM, 0.01 µF, 16 V, +/- 10%, X7R, 0402", Cap_Case=0402, Manufacturer="AT Ceramics", Supplier Part Number 1=1284-1540-1-ND, TempCo=X7R, Tolerance_%=10, Value1=Unknown, Value2=16V, ValueDisplayed=0.01µF, AEC Category=Q200, AEC Grade=N/A, AEC Qualified=N, Cap_F=0.00000001, ComponentLink1Description="Datasheet link", ComponentLink1URL=https://www.atceramics.com/UserFiles/520l.pdf, CompType=Capacitor, LatestRevisionDate=2016-06-23, MountType=SMT, PackageReference=0402, PartNumber=520L103KT16T, Polarized=N, Published=2008-06-19, Publisher="Texas Instruments", RoHS=Y, SizeArea_mm2=0.5, SizeAreaWB_mm2=3, SizeX_mm=1, SizeY_mm=0.5, SizeZ_mm=0.65, Supplier 1=Digi-Key, Supplier 2=Mouser, Supplier Part Number 2=581-520L103KT16T, SymbolVersion=2008-07-09, TaMax_C=125, TaMin_C=-55, Technology=Ceramic, U/M=EA, VDC_V=16
C13 C18 C23 C24 C26 C27 C28 C29: "CAP, CERM, 1 µF, 16 V, +/- 10%, X7R, 0603", Cap_Case=0603, Manufacturer=TDK, Supplier Part Number 1=445-1604-1-ND, TempCo=X7R, Tolerance_%=10, Value1="0.0057 ohm", Value2=16V, ValueDisplayed=1µF, AEC Category=Q200, AEC Qualified=?, Cap_F=0.000001, ComponentLink1Description="Datasheet link", ComponentLink1URL=http://www.tdk.co.jp/tefe02/e412_c.pdf, CompType=Capacitor, ESR_Ohm=0.0057, MountType=SMT, PackageReference=0603, PartNumber=C1608X7R1C105K080AC, Polarized=N, Published=2008-06-19, Publisher="Texas Instruments", RoHS=Y, Supplier 1=Digi-Key, Supplier 2=Mouser, Supplier 3=Farnell, Supplier Part Number 2=810-C1608X7R1C105K, Supplier Part Number 3=1907343, SymbolVersion=2008-07-09, TaMax_C=125, TaMin_C=-55, Technology=Ceramic, U/M=EA, VDC_V=16
  C13 C24 C28: LatestRevisionDate=2016-03-08
  C18 C23 C26 C27 C29: LatestRevisionDate=2016-06-30, SizeArea_mm2=1.28, SizeAreaWB_mm2=4.68, SizeX_mm=1.6, SizeY_mm=0.8, SizeZ_mm=1
C19 C20 C21 C22 C25: "CAP, CERM, 10 µF, 10 V, +/- 20%, X5R, 0603", Cap_Case=0603, Manufacturer=TDK, Supplier Part Number 1=445-6853-1-ND, TempCo=X5R, Tolerance_%=20, Value1="0.0078 ohm", Value2=10V, ValueDisplayed=10µF, AEC Category=Q200, AEC Qualified=?, Cap_F=0.00001, ComponentLink1Description="Datasheet link", ComponentLink1URL=http://www.tdk.com/pdf/general_B11.pdf, CompType=Capacitor, ESR_Ohm=0.0078, IRMS_A=1.85, LatestRevisionDate=2016-03-08, MountType=SMT, PackageReference=0603, PartNumber=C1608X5R1A106M080AC, Polarized=N, Published=2008-06-19, Publisher="Texas Instruments", RoHS=Y, Supplier 1=Digi-Key, Supplier 2=Mouser, Supplier 3=Farnell, Supplier Part Number 2=810-C1608X5R1A106M, Supplier Part Number 3=1962113, SymbolVersion=2008-07-09, TaMax_C=85, TaMin_C=-55, Technology=Ceramic, U/M=EA, VDC_V=10
C101 C102 C103 C104 C105: "CAP CER 0.1UF 16V X7R 0402", Digi-Key Part Number=490-16433-1-ND, Manufacturer="Murata Electronics", Manufacturer Part Number=GCM155R71C104JA55D, Package=C0402
C106: library part C0402, "CAP CER 10UF 16V X5R 0805", Manufacturer="Samsung Electro-Mechanics"
CE_TP CSB_TP GND_TP Hvoltage_TP MUXout_TP RampCLK_TP RampDIR_TP SCK_TP SDI_TP SYNC_TP SysRefReq_TP TranBase2_TP Vcc_TP VccRF_TP VTune_TP: "Test Point, Compact, White, TH", Manufacturer=Keystone, Supplier Part Number 1=5007K-ND, ComponentLink1Description="Datasheet Link", ComponentLink1URL=http://www.keyelco.com/userAssets/file/M60-2p60.pdf, CompType="Test Point Loop", LatestRevisionDate=2013-07-19, MountType=TH, PackageReference="White Compact Testpoint", PartNumber=5007, Publisher="Texas Instruments", RoHS=Y, Supplier 1=Digi-Key, SymbolVersion=2008-04-04, U/M=EA
J01 J02 J11 J12 RFoutAM RFoutAP RFoutBM RFoutBP: "JACK, SMA, 50 Ohm, Gold, Edge Mount", Color=Gold, Manufacturer=Johnson, Supplier Part Number 1=J808-ND, Voltage_V=170, ComponentLink1Description="Datasheet URL", ComponentLink1URL=https://cinchconnectivity.com/OA_MEDIA/drawings/dr-142-0771-831.pdf, CompType=Jack, ContactFinish=Gold, Gender=Female, LatestRevisionDate=2016-11-22, MountType=SMT, Orientation=R/A, PackageReference="JACK, SMA, 50 Ohm, Gold, Edge Mount", PartNumber=142-0771-831, Publisher="Texas Instruments", RoHS=Y, Supplier 1=Digi-Key, Supplier 2=Mouser, Supplier Part Number 2=530-142-0771-831, SymbolCreator=Altium, SymbolVersion=2016-06-06
J1: "Header (shrouded), 100mil, 5x2, Gold plated, SMD", Manufacturer=FCI, Supplier Part Number 1=609-3593-ND, ClassName=Header, ComponentLink1Description="Datasheet Link", ComponentLink1URL=http://portal.fciconnect.com/Comergent//fci/drawing/52601.pdf, CompType=Header, LatestRevisionDate=2013-07-19, MountType=SMT, PackageReference="SMT Header", PartNumber=52601-S10-8LF, Publisher="Texas Instruments", RoHS=Y, Supplier 1=Digi-Key, Supplier 2=Mouser, Supplier Part Number 2=649-52601-S10-8LF, SymbolCreator=a0412235, SymbolVersion=2013-03-14, U/M=EA
J2: library part "Header 6", "CONN HEADER VERT 6POS 2.54MM", Digi-Key Part Number=732-5319-ND, Manufacturer="Würth Elektronik", Manufacturer Part Number=61300611121
J3 J4: library part 1935161, "2 Position Wire to Board Terminal Block Horizontal with Board 0.197 _5.00mm_ Through Hole", Package=None, Digi-Key_Part_Number=277-1667-ND, Digi-Key_Purchase_URL=https://www.digikey.ca/product-detail/en/phoenix-contact/1935161/277-1667-ND/568614?utm_source=snapeda&utm_medium=aggregator&utm_campaign=symbol, MF="Phoenix Contact", MP=1935161, SnapEDA_Link=https://www.snapeda.com/parts/1935161/Phoenix%20Contact/view-part/423515/?ref=snap
L1 L2 L3: "Inductor, Multilayer, Air Core, 18 nH, 0.3 A, 0.36 ohm, SMD", Manufacturer=MuRata, Supplier Part Number 1=490-2626-1-ND, Value1="0.36 ohm", Value2=0.3A, ValueDisplayed=18nH, AEC Category=Q200, AEC Qualified=?, ComponentLink1Description="Datasheet link", ComponentLink1URL=http://search.murata.co.jp/Ceramy/image/img/PDF/ENG/L0075S0083LQG15HS.pdf, CompType=Inductor, DCR_ohm=0.36, Imax_A=0.3, Ind_H=18.0E-9, Irms="0.3A @ C rise", Isat="0.3A @ % inductance drop", LatestRevisionDate=2016-05-27, Material="Air Core", MountType=SMT, PackageReference="0402 polarized", PartNumber=LQG15HS18NJ02D, Published=2008-06-26, Publisher="Texas Instruments", RoHS=Y, Supplier 1=Digi-Key, Supplier 2=Mouser, Supplier 3=Farnell, Supplier Part Number 2=81-LQG15HS18NJ02D, Supplier Part Number 3=1404293, SymbolVersion=2008-07-23, Technology=Multilayer
Logo1: library part ESD_Susceptible, "ESD Susceptible Symbol", LatestRevisionDate=2011-10-25, LatestRevisionNote="Added ClassName of Logo.", Published=2009-03-03, Publisher="National Semiconductor", SymbolCreator=codlsc, SymbolVersion=2011-08-22
Logo3: library part Pb-Free, LatestRevisionDate=2014-11-20, Published=2009-03-03, Publisher="Texas Instruments", SymbolCreator=a0412235, SymbolVersion=2011-08-22
Logo4: library part FCC_disclaimer, "FCC_disclaimer", LatestRevisionDate=2014-11-20, Published=2009-03-03, Publisher="Texas Instruments", SymbolCreator=codlsc, SymbolVersion=2011-08-22
Q1 Q2: "RF TRANS 2 NPN 12V 10GHZ SOT363", Digi-Key Part Number=568-11508-1-ND, Manufacturer="NXP USA Inc.", Manufacturer Part Number=BFU520YX
R2: "RES, 100 k, 5%, 0.1 W, 0603", Manufacturer=Vishay-Dale, Power_W=0.1, Supplier Part Number 1=541-100KGCT-ND, TempCo="200 ppm/C", Tolerance_%=5, Value_Code=100k, Value1=5%, Value2=0.1W, AEC Category=Q200, AEC Qualified=?, ComponentLink1Description="Datasheet link", ComponentLink1URL=http://www.vishay.com/docs/20035/dcrcwe3.pdf, CompType=Resistor, EIA_Code=E24, LatestRevisionDate=2016-06-02, MountType=SMT, PackageReference=0603, PartNumber=CRCW0603100KJNEA, Published=2008-06-26, Publisher="Texas Instruments", Res_ohm=100000, RoHS=Y, SizeArea_mm2=1.28, SizeX_mm=1.6, SizeY_mm=0.8, SizeZ_mm=1, Supplier 1=Digi-Key, Supplier 2=Mouser, Supplier 3=Farnell, Supplier Part Number 2=71-CRCW0603J-100K-E3, Supplier Part Number 3=1692517, SymbolVersion=2009-05-29, Technology="Thick Film", U/M=EA, ValueDisplayed=100k, VDC_V=75
R2_LF: "RES, 68, 5%, 0.1 W, 0603", Manufacturer=Vishay-Dale, Power_W=0.1, Supplier Part Number 1=541-68GCT-ND, TempCo="200 ppm/C", Tolerance_%=5, Value_Code=68R0, Value1=5%, Value2=0.1W, ValueDisplayed=68, AEC Category=Q200, AEC Qualified=?, ComponentLink1Description="Datasheet link", ComponentLink1URL=http://www.vishay.com/docs/20035/dcrcwe3.pdf, CompType=Resistor, EIA_Code=E24, LatestRevisionDate=2016-11-02, MountType=SMT, PackageReference=0603, PartNumber=CRCW060368R0JNEA, Published=2008-06-26, Publisher="Texas Instruments", Res_ohm=68, RoHS=Y, SizeArea_mm2=1.28, SizeX_mm=1.6, SizeY_mm=0.8, SizeZ_mm=1, Supplier 1=Digi-Key, Supplier 2=Mouser, Supplier 3=Farnell, Supplier Part Number 2=71-CRCW0603J-68-E3, Supplier Part Number 3=1514786, SymbolVersion=2009-05-29, Technology="Thick Film", U/M=EA, VDC_V=75
R3 R4 R5 R6 R7 R8 R9 R10 R16 R17 R18 R19 R20 R21 R22 R23: "RES, 12k ohm, 5%, 0.1W, 0603", Manufacturer=Vishay-Dale, Power_W=0.1, Supplier Part Number 1=72M6821, Tolerance_%=5, Value_Code=12k0, Value1=5%, Value2=0.1W, ComponentLink1Description="Datasheet link", ComponentLink1URL=http://www.vishay.com/docs/20035/dcrcwe3.pdf, CompType=Resistor, EIA_Code=E24, LatestRevisionDate=2010-09-01, LatestRevisionNote="Enhanced Description field.", MountType=SMT, PackageReference=0603, PartNumber=CRCW060312K0JNEA, Published=2008-06-26, Publisher="National Semiconductor", Res_ohm=12000, RoHS=Y, Supplier 1=Newark, SymbolVersion=2009-05-29, Technology="Thick Film", U/M=EA, VDC_V=75
R3_LF: "RES, 0, 5%, 0.1 W, 0603", Manufacturer=Vishay-Dale, Power_W=0.1, Supplier Part Number 1=541-0.0GCT-ND, TempCo="200 ppm/C", Tolerance_%=5, Value_Code=0000, Value1=5%, Value2=0.1W, ValueDisplayed=0, AEC Category=Q200, AEC Qualified=?, ComponentLink1Description="Datasheet link", ComponentLink1URL=http://www.vishay.com/docs/20035/dcrcwe3.pdf, CompType=Resistor, EIA_Code=E24, LatestRevisionDate=2016-11-02, MountType=SMT, PackageReference=0603, PartNumber=CRCW06030000Z0EA, Published=2008-06-26, Publisher="Texas Instruments", Res_ohm=0, RoHS=Y, SizeArea_mm2=1.28, SizeX_mm=1.6, SizeY_mm=0.8, SizeZ_mm=1, Supplier 1=Digi-Key, Supplier 2=Mouser, Supplier 3=Farnell, Supplier Part Number 2=71-CRCW0603-0-E3, Supplier Part Number 3=1469739, SymbolVersion=2009-05-29, Technology="Thick Film", U/M=EA, VDC_V=75
R4_LF: "RES, 18, 5%, 0.1 W, 0603", Manufacturer=Vishay-Dale, Power_W=0.1, Supplier Part Number 1=541-18GCT-ND, TempCo="200 ppm/C", Tolerance_%=5, Value_Code=18R0, Value1=5%, Value2=0.1W, ValueDisplayed=18, AEC Category=Q200, AEC Qualified=?, ComponentLink1Description="Datasheet link", ComponentLink1URL=http://www.vishay.com/docs/20035/dcrcwe3.pdf, CompType=Resistor, EIA_Code=E24, LatestRevisionDate=2016-11-02, MountType=SMT, PackageReference=0603, PartNumber=CRCW060318R0JNEA, Published=2008-06-26, Publisher="Texas Instruments", Res_ohm=18, RoHS=Y, SizeArea_mm2=1.28, SizeX_mm=1.6, SizeY_mm=0.8, SizeZ_mm=1, Supplier 1=Digi-Key, Supplier 2=Mouser, Supplier 3=Farnell, Supplier Part Number 2=71-CRCW0603J-18-E3, Supplier Part Number 3=1514724, SymbolVersion=2009-05-29, Technology="Thick Film", U/M=EA, VDC_V=75
R27 R28: "RES, 140, 1%, 0.1 W, 0603", Manufacturer=Vishay-Dale, Power_W=0.1, Supplier Part Number 1=541-140HCT-ND, TempCo="100 ppm/C", Tolerance_%=1, Value_Code=140R, Value1=1%, Value2=0.1W, ValueDisplayed=140, AEC Category=Q200, AEC Qualified=?, ComponentLink1Description="Datasheet link", ComponentLink1URL=http://www.vishay.com/docs/20035/dcrcwe3.pdf, CompType=Resistor, EIA_Code=E96, LatestRevisionDate=2016-11-02, MountType=SMT, PackageReference=0603, PartNumber=CRCW0603140RFKEA, Published=2008-06-26, Publisher="Texas Instruments", Res_ohm=140, RoHS=Y, SizeArea_mm2=1.28, SizeX_mm=1.6, SizeY_mm=0.8, SizeZ_mm=1, Supplier 1=Digi-Key, Supplier 2=Mouser, Supplier 3=Farnell, Supplier Part Number 2=71-CRCW0603-140-E3, Supplier Part Number 3=1151701, SymbolVersion=2009-05-29, Technology="Thick Film", U/M=EA, VDC_V=75
R32: "RES, 100, 1%, 0.1 W, 0603", Manufacturer=Vishay-Dale, Power_W=0.1, Supplier Part Number 1=541-100HCT-ND, TempCo="100 ppm/C", Tolerance_%=1, Value_Code=100R, Value1=1%, Value2=0.1W, ValueDisplayed=100, AEC Category=Q200, AEC Qualified=?, ComponentLink1Description="Datasheet link", ComponentLink1URL=http://www.vishay.com/docs/20035/dcrcwe3.pdf, CompType=Resistor, EIA_Code=E96, LatestRevisionDate=2016-11-02, MountType=SMT, PackageReference=0603, PartNumber=CRCW0603100RFKEA, Published=2008-06-26, Publisher="Texas Instruments", Res_ohm=100, RoHS=Y, SizeArea_mm2=1.28, SizeX_mm=1.6, SizeY_mm=0.8, SizeZ_mm=1, Supplier 1=Digi-Key, Supplier 2=Mouser, Supplier 3=Farnell, Supplier Part Number 2=71-CRCW0603-100-E3, Supplier Part Number 3=1469752, SymbolVersion=2009-05-29, Technology="Thick Film", U/M=EA, VDC_V=75
R33: "RES, 10 ohm, 5%, 0.1W, 0603", Manufacturer=Vishay-Dale, Power_W=0.1, Supplier Part Number 1=541-10GCT-ND, TempCo="200 ppm/C", Tolerance_%=5, Value_Code=10R0, Value1=5%, Value2=0.1W, ComponentLink1Description="Datasheet link", ComponentLink1URL=http://www.vishay.com/docs/20035/dcrcwe3.pdf, CompType=Resistor, EIA_Code=E24, LatestRevisionDate=2013-01-08, MountType=SMT, PackageReference=0603, PartNumber=CRCW060310R0JNEA, Published=2008-06-26, Publisher="Texas Instruments", Res_ohm=10, RoHS=Y, Supplier 1=Digi-Key, Supplier 2=Mouser, Supplier 3=Farnell, Supplier Part Number 2=71-CRCW0603J-10-E3, Supplier Part Number 3=1514712, SymbolVersion=2009-05-29, Technology="Thick Film", U/M=EA, VDC_V=75
R36 R41 R42 R43 R44 R45: "RES, 0 ohm, 5%, 0.1W, 0603", DigiKeyPartNumber=541-0.0GCT-ND, Manufacturer=Vishay-Dale, Power_W=0.1, Supplier Part Number 1=52K8014, Tolerance_%=5, Value_Code=0000, Value1=5%, Value2=0.1W, ComponentLink1Description="Datasheet link", ComponentLink1URL=http://www.vishay.com/docs/20035/dcrcwe3.pdf, CompType=Resistor, EIA_Code=E24, LatestRevisionDate=2010-09-01, LatestRevisionNote="Enhanced Description field.", MountType=SMT, PackageReference=0603, PartNumber=CRCW06030000Z0EA, Published=2008-06-26, Publisher="National Semiconductor", Res_ohm=0, RoHS=Y, Supplier 1=Newark, SymbolVersion=2009-05-29, Technology="Thick Film", U/M=EA, VDC_V=75
R37 R38 R39 R40: "RES, 50, 0.1%, 0.05 W, 0402", Manufacturer=Vishay-Dale, Power_W=0.05, Supplier Part Number 1=FC0402-50BWCT-ND, TempCo="25 ppm/C", Tolerance_%=0.1, Value_Code=50R0, Value1=0.1%, Value2=0.05W, ValueDisplayed=50, AEC Category=Q200, AEC Grade=N/A, AEC Qualified=N, ComponentLink1Description="Datasheet link", ComponentLink1URL=http://www.vishay.com/docs/60093/fcseries.pdf, CompType=Resistor, LatestRevisionDate=2016-06-23, MountType=SMT, PackageReference=0402, PartNumber=FC0402E50R0BST1, Published=2008-06-26, Publisher="Texas Instruments", Res_ohm=50, RoHS=Y, SizeArea_mm2=0.5, SizeX_mm=1, SizeY_mm=0.5, SizeZ_mm=0.6, Supplier 1=Digi-Key, Supplier 2=Mouser, Supplier 3=Farnell, Supplier Part Number 2=71-FC0402E50R0BST1, Supplier Part Number 3=2309101, SymbolVersion=2009-05-29, Technology="Thin Film", U/M=EA
R101 R104: "RES SMD 10K OHM 0.1% 1/16W 0402", Digi-Key Part Number=YAG1346CT-ND, Manufacturer=Yageo, Manufacturer Part Number=RT0402BRD0710KL, Package=0402, Tolerance=0.1%
R102 R103 R105 R106: "RES SMD 1K OHM 1% 1/16W 0402", Digi-Key Part Number=311-1.00KLRCT-ND, Manufacturer=Yageo, Manufacturer Part Number=RC0402FR-071KL, Package=0402, Tolerance=0.1%
R107: Digi-Key Part Number=311-4.7KLRCT-ND, Manufacturer=Yageo, Manufacturer Part Number=RC0402FR-074K7L, Package=0402, Tolerance=1%
R108 R109: "RES SMD 0 OHM JUMPER 1/16W 0402", Digi-Key Part Number=311-1.00KLRCT-ND, Manufacturer=Yageo, Manufacturer Part Number=AC0402JR-070RL, Package=0402, Tolerance=0.1%
U1: "High Performance, Wideband PLLatinum RF Synthesizer, RHA0040A (VQFN-40)", Alternate Manufacturer="Texas Instruments", Alternate PartNumber=LMX2594RHAT, ComponentLink1Description="Datasheet Link", ComponentLink1URL="https://sps06.itg.ti.com/sites/KMS/crossdivteams/altium/docs/ComponentDatasheets/LMX2594 Datasheet (Internal).pdf", CompType=IC, LatestRevisionDate=2016-10-21, Manufacturer="Texas Instruments", MountType=SMT, PackageDescription=VQFN-40, PackageReference=RHA0040A, PartNumber=LMX2594RHAR, Publisher="Texas Instruments", SizeArea_mm2=36, SizeAreaWB_mm2=64, SizeX_mm=6, SizeY_mm=6, SizeZ_mm=1, SymbolCreator=Altium, SymbolVersion=2016-06-23, U/M=EA
U4: "Digital Potentiometer 10k Ohm 2 Circuit 256 Taps SPI Interface 16-TQFN (3x3)", Digi-Key Part Number=MAX5487ETE+TCT-ND, Manufacturer="Maxim Integrated", Manufacturer Part Number=MAX5487ETE+T, Package="QFN-16 Maxim"
Y1: "Crystal Oscillator, 100MHz, LVDS, 3.3V, SMD", Frequency=100MHz, Frequency Stability=±25ppm, Manufacturer=Vectron, ComponentLink1Description="Datasheet Link", ComponentLink1URL=https://www.vectron.com/products/xo/vc708.pdf, CompType=Oscillator, LatestRevisionDate=2016-11-29, MountType=SMT, PackageReference=5x7mm, PartNumber=VC-708-EDE-FNXN-100M000000, Publisher="Texas Instruments", RoHS=Y, SizeArea_mm2=35, SizeAreaWB_mm2=63, SizeX_mm=5, SizeY_mm=7, SizeZ_mm=1.8, SymbolCreator=Altium, SymbolVersion=2016-11-29, TaMax_C=85, TaMin_C=-40, U/M=EA

## Via types
v1: diameter 25, hole 16, Top Layer to Bottom Layer, 152 vias
v2: diameter 25, hole 10, Top Layer to Bottom Layer, 148 vias
v3: diameter 19.68, hole 7.87, Top Layer to Bottom Layer, 12 vias
v4: diameter 15, hole 8, Top Layer to Bottom Layer, 7 vias
v5: diameter 25, hole 10, Top Layer to Bottom Layer, tented both sides, 1 vias
v6: diameter 24, hole 10, Top Layer to Bottom Layer, 1 vias

## Nets (pads, with @x,y where several pads share a name; then routed paths per layer and width w, separated by ;. In a path a pad name is that pad's centre, name@x,y a point inside that pad or via, vN(x,y) a via of type N, cw(c..) or ccw(c..) an arc to the next point about the centre after c; other vN are vias at no path point)
15V: J4.1 R107.2
Base1: Q1.6 R101.1 R103.1 | length 111
  Top Layer w10: R101.1@2263.01,1192 2263.01,1144.68 Q1.6@2263.09,1144.59 2264,1143.69 2287.95,1143.69 2300.64,1130.99 R103.1@2321,1130.99
Base2: Q2.6 R104.1 R106.1 TranBase2_TP.1 | length 671.2
  Top Layer w10: Q2.6@2828.09,1658 2828,1657.91 2828,1632 2813.99,1617.99 R106.1@2813.99,1599 2813.99,1262.01 TranBase2_TP.1@2970,1106
  Top Layer w10.5: Q2.6@2828.09,1658 2829.09,1657 2874,1657 2874.99,1657.99 R104.1@2876,1657.99
Dinput1: J01.1 R102.2 | length 141
  Top Layer w28.5: J01.1@1831,1144 R102.2@1972,1144
Dinput2: J02.1 R105.2 | length 140
  Top Layer w28.5: R105.2@2828,1912 J02.1@2828,2052
Dout1: C107.1 R108.1 U4.14 | length 178.6
  Top Layer w10.5: R108.1@2144,1646.01 R108.1@2144.16,1645.85 ; 2149.16,1643.84 U4.14@2194.5,1643.84
  Top Layer w28.5: C107.1@2016,1644 2139,1644 2149,1644
Dout2: C108.1 R109.1 U4.11 | length 122.8
  Top Layer w28.5: R109.1@2240.15,1735.25 C108.1@2240.15,1858
GND: C1.1 C1_LF.2 C2.1 C3.1 C3_LF.2 C4.1 C4_LF.1 C6.1 C8.1 C9.1 C11.1 C13.2 C16.1 C17.1 C18.1 C19.1 C20.2 C21.1 C22.2 C23.1 C24.1 C25.2 C26.1 C27.1 C28.1 C29.2 C30.1 C101.1 C102.2 C103.2 C104.2 C105.2 C106.2 GND_TP.1 J01. J01.2 J01.3 J01.4 J1.6 J02. J02.2 J2.3 J02.3 J02.4 J2.5 J3.1 J4.2 J11. J11.2 J11.3 J11.4 J12. J12.2 J12.3 J12.4 Q1.2 Q1.5 Q2.2 Q2.5 R2_LF.2 R3.1 R6.1 R7.1 R10.1 R17.1 R18.1 R21.1 R23.1 R27.1 R28.1 RFoutAM. RFoutAM.2 RFoutAM.3 RFoutAM.4 RFoutAP. RFoutAP.2 RFoutAP.3 RFoutAP.4 RFoutBM. RFoutBM.2 RFoutBM.3 RFoutBM.4 RFoutBP. RFoutBP.2 RFoutBP.3 RFoutBP.4 U1.2 U1.4 U1.6 U1.13 U1.14 U1.25 U1.31 U1.34 U1.39 U1.40 U1.41 U4.7 U4.9 U4.10 U4.13 U4.17 Y1.3 | length 5145.8
  Top Layer w6: 5171.6,1572.4 5174.7,1572.4
  Top Layer w10: C101.1@2220,1476.99 2220.8,1476.2 2246.3,1476.2 v2(2247.1,1475.4) ; v1(2250,1634) 2259.84,1643.84 U4.10@2259.84,1690.5 U4.10@2260.16,1690.81 ; Q2.5@2802.5,1658 Q2.2@2802.5,1746.19 ; C106.2@3295.2,1665.2 3296.2,1666.2 C106.2@3302.66,1666.2 ; U1.40@4842.83,1305.42 4868.42,1305.42 U1.41@4888.1,1325.1 ; U1.39@4842.83,1325.1 U1.41@4888.1,1325.1 ; U1.34@4842.83,1423.53 4902.02,1423.53 4912.67,1412.88 4912.67,1394 v3(4927.87,1394) ; U1.31@4842.83,1482.58 4858.72,1482.58 ; 4855.63,1481.53 U1.41@4914.82,1481.53 ; U1.2@4888.1,1279.83 U1.41@4888.1,1325.1 ; U1.41@4900.57,1363.03 U1.41@4912.67,1375.12 ; U1.41@4912.67,1427.79 U1.41@4913.09,1428.21 ; U1.4@4927.47,1279.83 4927.47,1349.67 4923.21,1349.67 U1.41@4917.94,1354.94 ; U1.41@4927.47,1389.93 4912.67,1389.93 U1.41@4912.67,1375.12 ; U1.41@4931.54,1394 U1.41@4958.84,1421.29 ; U1.41@4957,1394 U1.41@4917.94,1354.94 ; U1.6@4966.84,1279.83 U1.41@4966.84,1358.7 ; U1.41@4966.84,1429.3 U1.25@4966.84,1508.17 ; U1.13@5071.17,1344.79 5024.21,1344.79 5024.21,1352.24 5011.98,1364.47 U1.14@5071.17,1364.47 ; U1.41@4888.1,1325.1 U1.41@4917.94,1354.94 ; U1.41@4912.67,1375.12 4912.67,1360.21 U1.41@4917.94,1354.94
  Top Layer w10.5: v2(2219,1119) Q1.5@2263.09,1119 ; U4.17@2259.84,1643.84 U4.7@2306.5,1643.84
  Top Layer w20: v2(2233,1230) C104.2@2263.99,1230 ; C105.2@2917,1657 2917,1686.65 2918,1687.65 v2(2918,1689) ; C106.2@3302.66,1666.2 3363.85,1666.2 3364.85,1667.2 v2(3366.2,1667.2) ; R3.1@3731,343.5 R3.1@3736,338.5 ; C9.1@4400,1917.5 4400,1962.65 4401,1963.65 v2(4401,1965) ; v2(4498,1975) 4498,1973.65 4500,1971.65 C8.1@4500,1921.46 ; C25.2@4890,1109.38 C25.2@4890.7,1108.68
  Top Layer w25: R10.1@4424,397.5 4426,399.5 v2(4426,433)
  Top Layer w30: R3.1@3736,338.5 3737,339.5 v2(3737,374) ; v2(3846.2,1823.4) 3861.54,1808.06 C4.1@3861.54,1764 3864.02,1761.52 3864.02,1676.48 C3.1@3866.5,1674 ; R17.1@3885,824.5 R18.1@3940,824.5 ; R6.1@3899,338.5 v2(3899,369.44) v2@3901.56,372 ; v2(3939,800) R18.1@3939,823.5 ; J1.6@4080,692.5 v2(4080,782) ; v2(4081,1937) C1.1@4137.5,1937 ; v2(4089,385) 4125.5,385 R7.1@4126,385.5 ; v2(4133,1797) 4133.54,1797.54 C2.1@4133.54,1854 ; v2(4431,789) R23.1@4431,822.5 ; v2(4627.2,1466.3) C21.1@4656,1466.3 ; v2(4628.2,1520.7) 4658.5,1520.7 C20.2@4659.5,1521.7 ; v2(4631.9,1307) 4657.54,1307 C23.1@4658.54,1308 ; v2(4632.2,1408.4) C4_LF.1@4659,1409 ; v2@4633,1361 C22.2@4663.38,1361 ; v2(4725,1643) C18.1@4775,1643 ; v2(4726,1594) 4727,1595 C19.1@4771.5,1595 ; v2(4781.1,1183.9) 4781.1,1196.9 C24.1@4782.6,1198.4 ; v2(4845,898) R27.1@4903.5,898 ; v2(4881.8,1077.7) C25.2@4881.8,1101.18 ; C13.2@4976.93,533 v2(5064,533) 5064,619.95 Y1.3@5067,622.95 ; C6.1@5017.3,1676.37 v2(5017.3,1700) ; v2@5125,1171.33 C26.1@5146.19,1192.51 ; R28.1@5129.5,897 v2(5189,897) ; v2@5152.17,1130.8 v2(5148.67,1127.3) 5149.5,1127.3 C1_LF.2@5172.73,1150.53 ; C11.1@5236.92,1452.6 v6@5263.6,1452.6 ; C3_LF.2@5348.14,987.83 5348.67,987.83 R2_LF.2@5387.27,1026.43 ; RFoutBM.2@5540.12,1295.18 RFoutBM.2@5611,1295.18 ; RFoutBP.3@5547.07,1610.93 RFoutBP.3@5611,1610.93
  Top Layer w35: R21.1@4277,821.5 4313.5,821.5 v2(4314,821)
  Top Layer w40: v2(5515,783) v2@5660,783
  Signal Layer 1 w50: 4571,2133 5491,2133 ; 5695,989 5695,1909
  Bottom Layer w30: v2(4906.6,1042.3) 4912.26,1042.3 C27.1@4933.3,1063.34 ; v3(4986.13,1335.73) 5011.86,1310 C28.1@5064.15,1310 ; v3@4989.67,1452.27 C30.1@5011.43,1479.53 ; v3(5015.27,1364.87) C29.2@5048.44,1393